# Altium PCB main.PcbDoc (part 1 of 2)
Units mil, origin at the board's own origin, x right, y up, seen from the top; angles counter-clockwise.
Board outline 2900 x 2350 mil, 2 copper layers (Top Layer, Bottom Layer); 128 components, 79 nets, 285 pads, 6 vias.
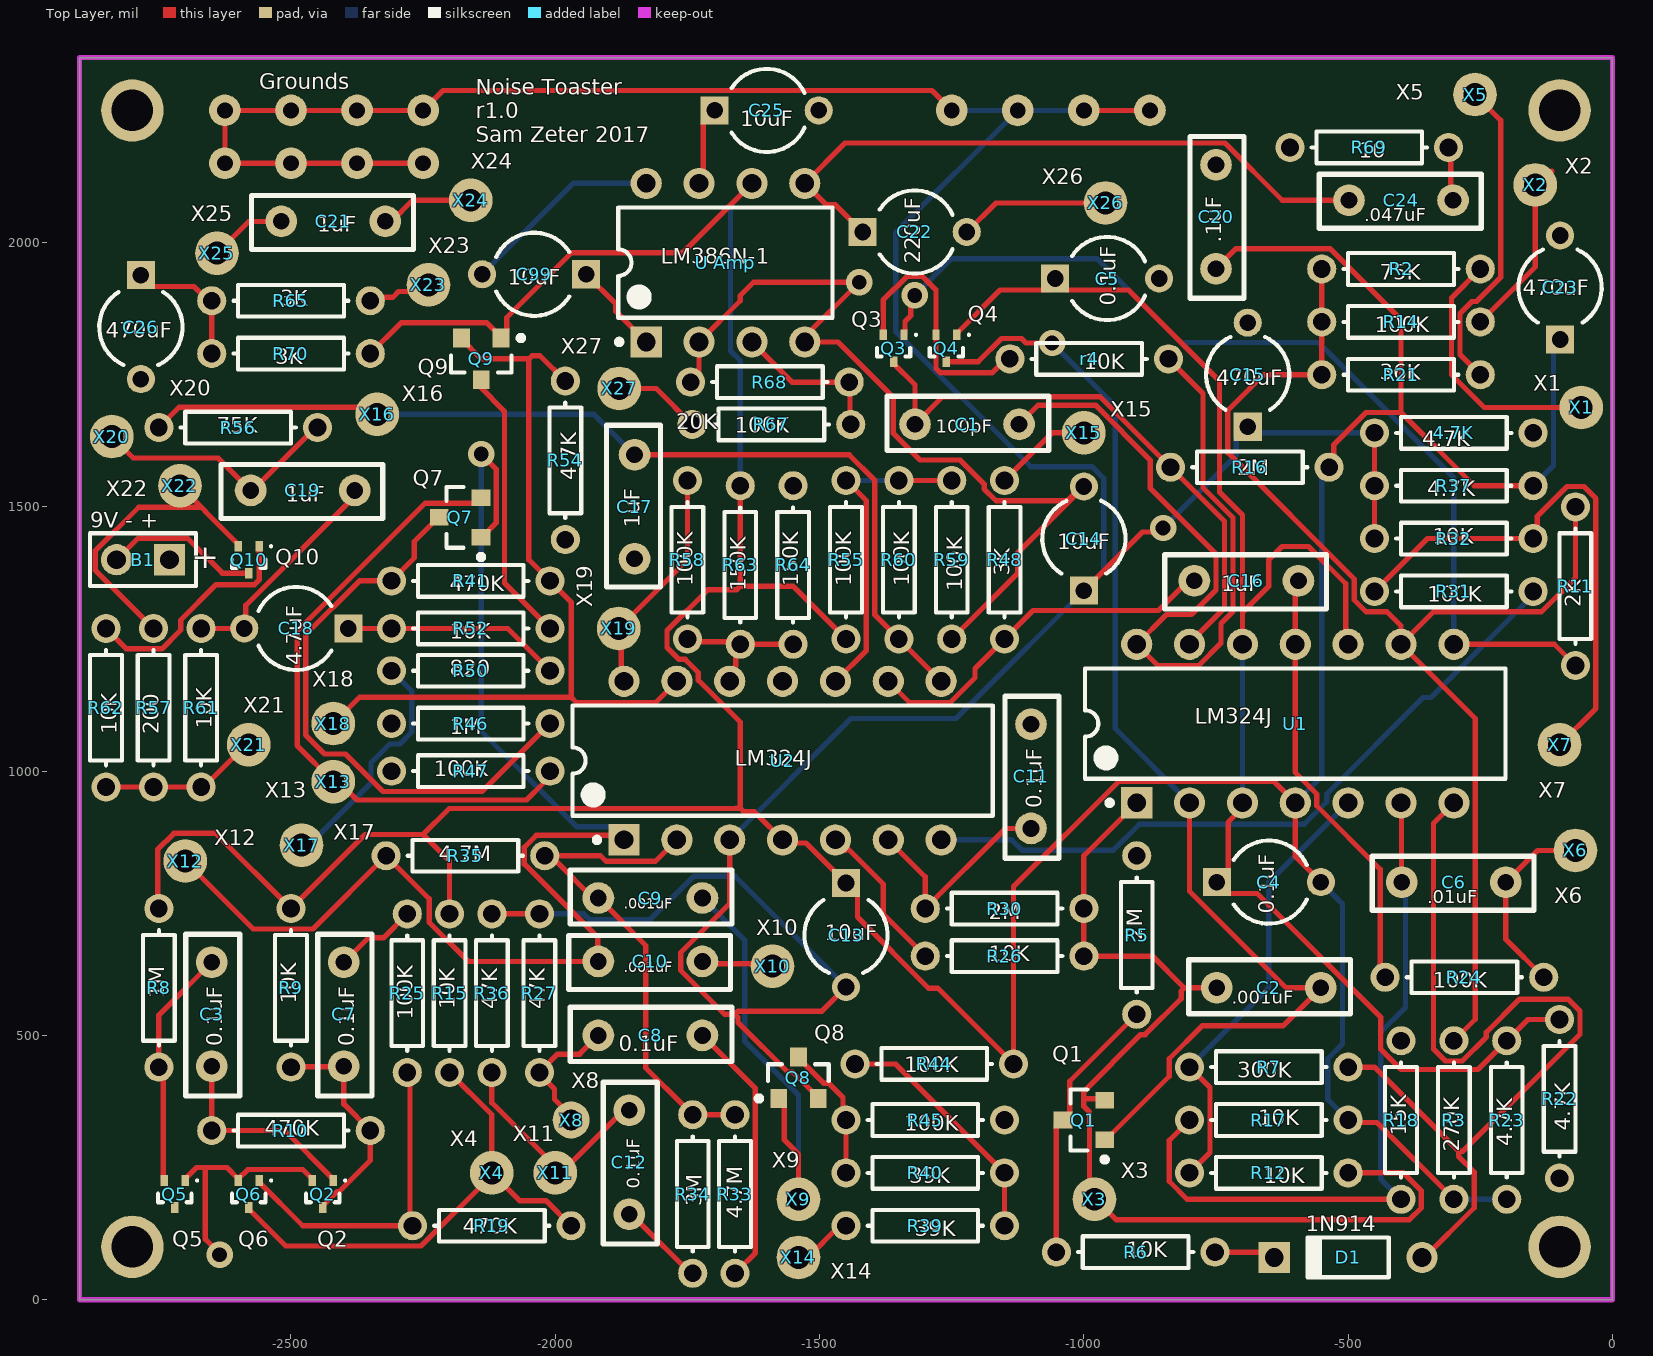
[diagram p0: Top Layer view]
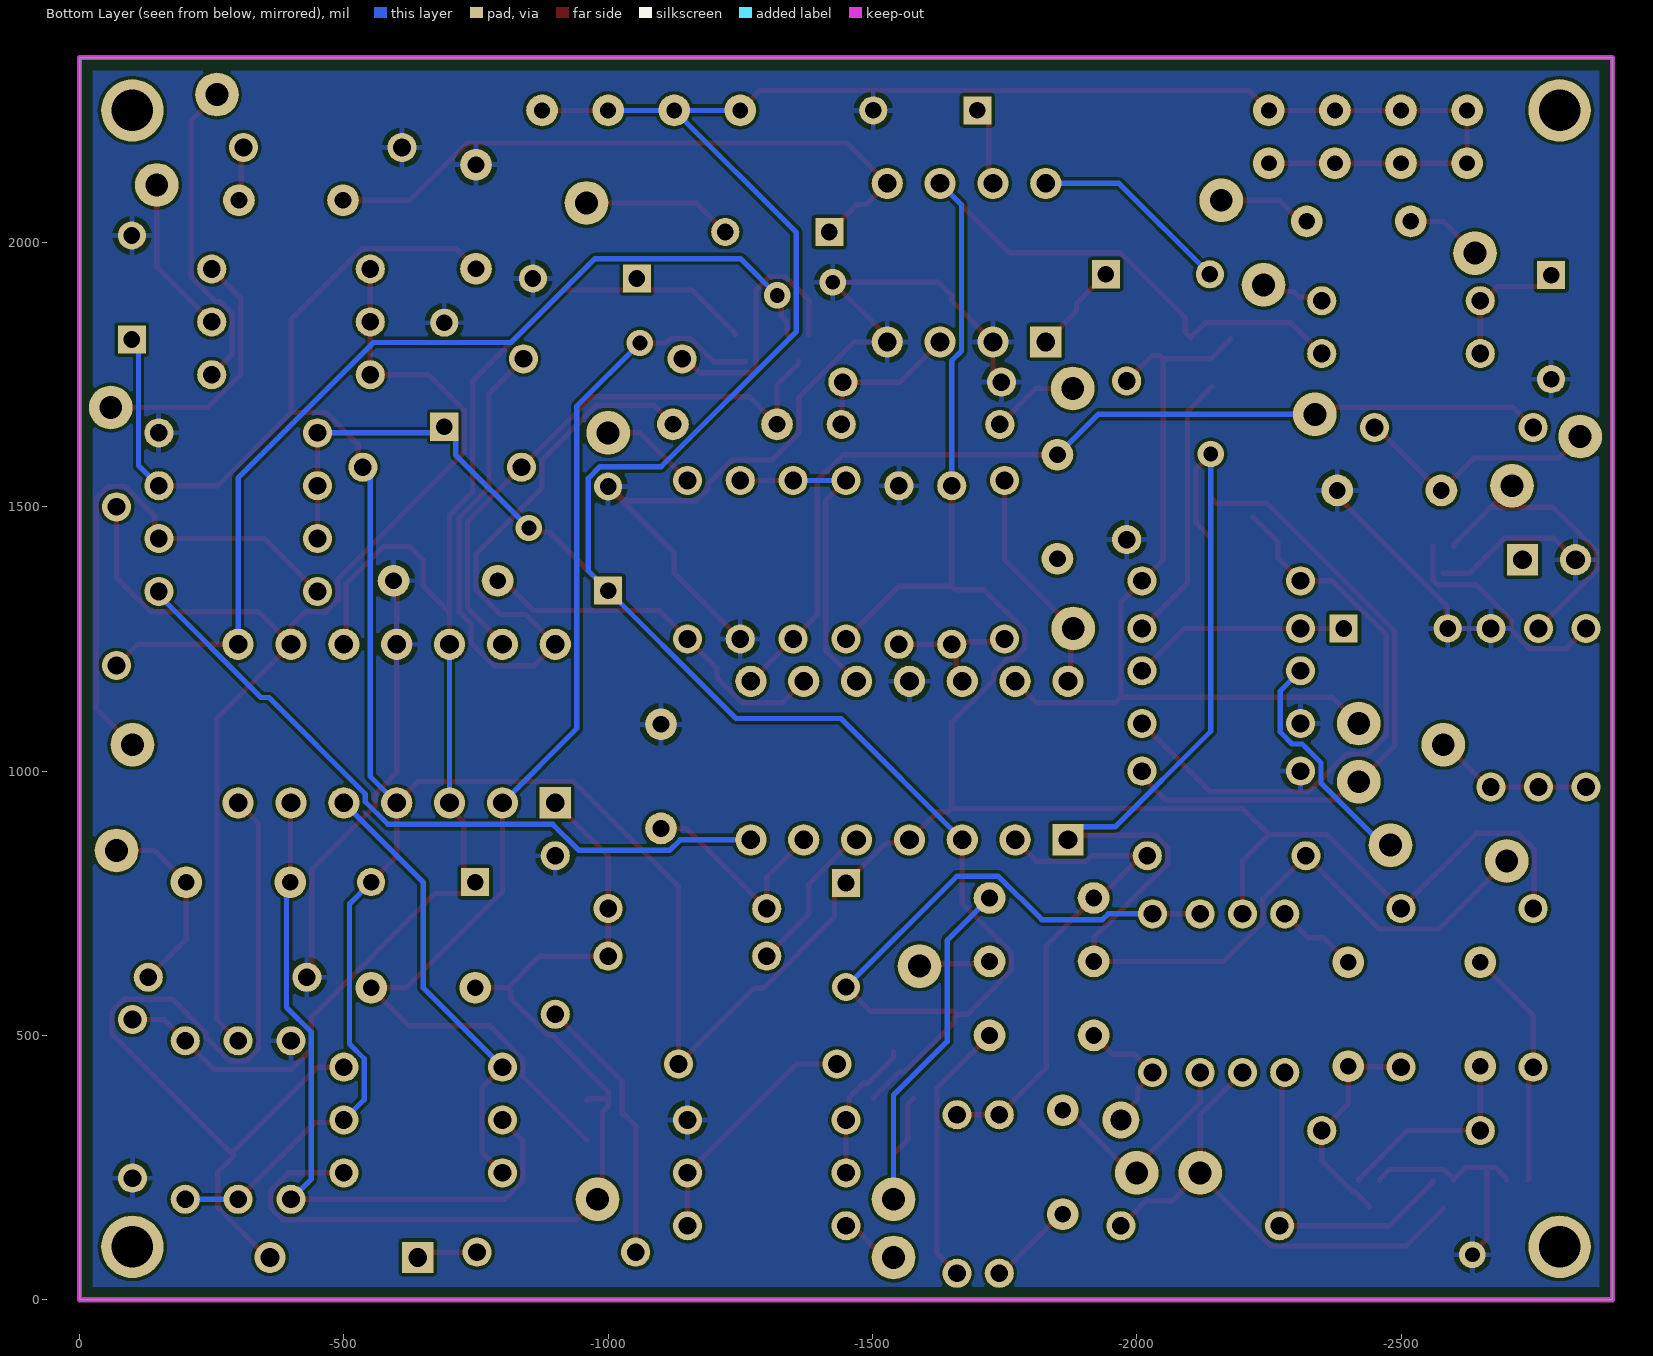
[diagram p1: Bottom Layer view, seen from below]

## Layer stack, top to bottom
Top Solder: solder mask 0.4, Solder Resist, Dk 3.5
Top Layer: signal copper 1.4
Dielectric 1: dielectric 12.6, FR-4, Dk 4.8
Bottom Layer: signal copper 1.4
Bottom Solder: solder mask 0.4, Solder Resist, Dk 3.5

## Board outline
-2900,0 -2900,2350 0,2350 0,0

## Design rules (kind name [scope] priority, off if disabled: settings)
Clearance [All] p1: gap=6 ignorepadtopadclearanceinfootprint=TRUE
MinimumSolderMaskSliver [All] p1: minsoldermaskwidth=3
PolygonConnect [All] p1: connectstyle=Relief reliefconductorwidth=10 reliefentries=4 polygonreliefangle="90 Angle" airgapwidth=10
RoutingVias [All] p1: holewidth=28 width=50 viastyle="Through Hole" minholewidth=28 minwidth=50 maxholewidth=28 maxwidth=50
SilkToSilkClearance [All] p1 off: silktosilkclearance=10
SilkToSolderMaskClearance [IsPad] p1: minsilkscreentomaskgap=6 clearancetoexposedcopper=TRUE
SolderMaskExpansion [All] p1: expansion=4
UnRoutedNet [All] p1: checkbadconnections=TRUE
Width [All] p1: maxlimit=25 minlimit=6 preferedwidth=10 minimp=50.000000 maximp=50.000000 favimp=50.000000
26 further rules are at their usual default settings.

## Classes and differential pairs
component class "AD Generator": C18 Q9 Q10 R50 R52 R54 R57 R58 R61 R62 R63 R64 X17 X18 X19 X21 X22
component class "Audio Amplifier": C20 C21 C22 C24 C25 C99 R67 R68 R69 "U Amp" X24 X25 X26 X27
component class LFO: C16 C17 C19 C26 R48 R55 R56 R59 R60 R65 R70 X15 X16 X20 X23
component class Top: 4.7K B1 C13 C14 C15 C23 R37
component class VCA: Q7 R41 R46 R47 X12 X13
component class "VC LPF": C8 C9 C10 C12 Q8 R27 R33 R34 R35 R36 R39 R40 R44 R45 U2 X8 X9 X10 X11 X14
component class VCO: C1 C2 C4 C5 C6 C11 D1 Q1 Q3 Q4 R2 R3 r4 R5 R6 R7 R11 R12 R14 R16 R17 R18 R21 R22 R23 R24 R26 R30 R31 R32 U1 X1 X2 X3 X5 X6 X7
component class WNS: C3 C7 Q2 Q5 Q6 R8 R9 R10 R15 R19 R25 X4

## Components (designator, comment, footprint, x,y, rotation, side; value= is the part's Value field where it differs from the comment)
4.7K "4.7K" AXIAL-0.3 -300,1640 r0 top
B1 "9V - +" BAT-2 -2780,1400 r180 top
C1 "100pF" "Cap Film 5" -1221,1656 r0 top
C2 ".001uF" "Cap Film 5" -650,590 r0 top value=0.001uF
C3 "0.1uF" "Cap Film 5" -2650,540 r270 top
C4 "0.1uF" CAPR5-4X5 -650,790 r0 top
C5 "0.1uF" CAPR5-4X5 -956,1932 r0 top
C6 ".01uF" "Cap Film 5" -300,790 r180 top value=0.01uF
C7 "0.1uF" "Cap Film 5" -2400,540 r270 top
C8 "0.1uF" "Cap Film 5" -1820,500 r0 top
C9 ".001uF" "Cap Film 5" -1820,760 r0 top value=0.001uF
C10 ".001uF" "Cap Film 5" -1820,640 r180 top value=0.001uF
C11 "0.1uF" "Cap Film 5" -1100,990 r270 top
C12 "0.1uF" "Cap Film 5" -1860,260 r270 top
C13 "10uF" CAPR5-4X5 -1450,690 r270 top
C14 "10uF" CAPR5-4X5 -1000,1440 r90 top
C15 "470uF" CAPR5-4X5 -690,1750 r90 top
C16 "1uF" "Cap Film 5" -692.43,1360 r180 top
C17 "1uF" "Cap Film 5" -1850,1500 r90 top
C18 "4.7uF" CAPR5-4X5 -2490,1270 r180 top
C19 "1uF" "Cap Film 5" -2478,1531 r180 top
C20 ".1uF" "Cap Film 5" -750,2049 r270 top value=0.1uF
C21 "1uF" "Cap Film 5" -2420,2040 r180 top
C22 "220uF" CAPR5-4X5 -1320,2020 r0 top
C23 "470uF" CAPR5-4X5 -99,1915 r90 top
C24 ".047uF" "Cap Film 5" -400,2080 r180 top value=0.047uF
C25 "10uF" CAPR5-4X5 -1600,2250 r0 top
C26 "470uF" CAPR5-4X5 -2784,1840 r270 top
C99 "10uF" CAPR5-4X5 -2040,1940 r180 top
D1 "1N914" DO-35 -500,80 r180 top
Q1 "Q1" ONSC-SOT-23-3-318-08_V -1000,340 r180 top
Q2 "Q2" ONSC-SC-75-3-463-01_V -2440,200 r270 top
Q3 "Q3" ONSC-SC-75-3-463-01_V -1360,1800 r270 top
Q4 "Q4" ONSC-SC-75-3-463-01_V -1260,1800 r270 top
Q5 "Q5" ONSC-SC-75-3-463-01_V -2720,200 r270 top
Q6 "Q6" ONSC-SC-75-3-463-01_V -2580,200 r270 top
Q7 "Q7" ONSC-SOT-23-3-318-08_V -2180,1480 r180 top
Q8 "Q8" ONSC-SOT-23-3-318-08_V -1540,420 r90 top
Q9 "Q9" ONSC-SOT-23-3-318-08_V -2140,1780 r270 top
Q10 "Q10" ONSC-SC-75-3-463-01_V -2580,1400 r270 top
R2 "75K" AXIAL-0.3 -400,1950 r180 top
R3 "270K" AXIAL-0.3 -300,340 r270 top
r4 "10K" AXIAL-0.3 -990,1780 r180 top (schematic designator R4)
R5 "2M" AXIAL-0.3 -900,690 r270 top
R6 "10K" AXIAL-0.3 -902.01,90 r0 top
R7 "300K" AXIAL-0.3 -650,440 r0 top
R8 "1M" AXIAL-0.3 -2750,590 r90 top
R9 "10K" AXIAL-0.3 -2500,590 r90 top
R10 "470K" AXIAL-0.3 -2500,320 r0 top
R11 "2K" AXIAL-0.3 -70,1350 r270 top
R12 "10K" AXIAL-0.3 -650,240 r180 top
R14 "100K" AXIAL-0.3 -400,1850 r180 top
R15 "10K" AXIAL-0.3 -2200,580 r90 top
R16 "2M" AXIAL-0.3 -686,1575 r180 top
R17 "10K" AXIAL-0.3 -650,340 r180 top
R18 "15K" AXIAL-0.3 -400,340 r90 top
R19 "470K" AXIAL-0.3 -2120,140 r0 top
R21 "36K" AXIAL-0.3 -400,1750 r180 top
R22 "4.7K" AXIAL-0.3 -100,380 r90 top
R23 "4.7K" AXIAL-0.3 -200,340 r90 top
R24 "100K" AXIAL-0.3 -280,610 r180 top
R25 "100K" AXIAL-0.3 -2280,580 r90 top
R26 "10K" AXIAL-0.3 -1150,650 r180 top
R27 "47K" AXIAL-0.3 -2030,580 r90 top
R30 "2M" AXIAL-0.3 -1150,740 r180 top
R31 "100K" AXIAL-0.3 -300,1340 r180 top
R32 "10K" AXIAL-0.3 -300,1440 r180 top
R33 "4.7M" AXIAL-0.3 -1660,200 r90 top
R34 "3M" AXIAL-0.3 -1740,200 r90 top
R35 "4.7M" AXIAL-0.3 -2170,840 r180 top
R36 "47K" AXIAL-0.3 -2120,580 r90 top
R37 "4.7K" AXIAL-0.3 -300,1540 r0 top
R39 "39K" AXIAL-0.3 -1300,140 r0 top
R40 "39K" AXIAL-0.3 -1300,240 r180 top
R41 "470K" AXIAL-0.3 -2160,1360 r0 top
R44 "100K" AXIAL-0.3 -1283,446 r180 top
R45 "100K" AXIAL-0.3 -1300,340 r180 top
R46 "1M" AXIAL-0.3 -2160,1090 r0 top
R47 "100K" AXIAL-0.3 -2160,1000 r0 top
R48 "3K" AXIAL-0.3 -1150,1400 r90 top
R50 "820" AXIAL-0.3 -2160,1190 r0 top
R52 "10K" AXIAL-0.3 -2160,1270 r0 top
R54 "4.7K" AXIAL-0.3 -1981,1588 r90 top
R55 "100K" AXIAL-0.3 -1450,1400 r90 top
R56 "75K" AXIAL-0.3 -2600,1650 r0 top
R57 "200" AXIAL-0.3 -2760,1120 r90 top
R58 "100K" AXIAL-0.3 -1750,1400 r90 top
R59 "100K" AXIAL-0.3 -1250,1400 r90 top
R60 "100K" AXIAL-0.3 -1350,1400 r270 top
R61 "10K" AXIAL-0.3 -2670,1120 r270 top
R62 "10K" AXIAL-0.3 -2850,1120 r90 top
R63 "150K" AXIAL-0.3 -1650,1390 r90 top
R64 "150K" AXIAL-0.3 -1550,1390 r90 top
R65 "3K" AXIAL-0.3 -2500,1890 r0 top
R67 "100K" AXIAL-0.3 -1591,1656 r0 top
R68 "20K" AXIAL-0.3 -1594,1736 r0 top
R69 "10" AXIAL-0.3 -460,2180 r0 top
R70 "3K" AXIAL-0.3 -2500,1790 r180 top
U1 "LM324J" J14A -600,1090 r90 top
U2 "LM324J" J14A -1570,1020 r90 top
"U Amp" "LM386N-1" N08E -1678,1962 r90 top
X1 "X1" Pad#1 -59,1688 r0 top
X2 "X2" Pad#1 -146,2109 r0 top
X3 "X3" Pad#1 -980,190 r0 top
X4 "X4" Pad#1 -2120,240 r0 top
X5 "X5" Pad#1 -260,2280 r0 top
X6 "X6" Pad#1 -70,850 r0 top
X7 "X7" Pad#1 -100,1050 r0 top
X8 "X8" Pad#2 -1970,340 r0 top
X9 "X9" Pad#1 -1540,190 r0 top
X10 "X10" Pad#1 -1589,631 r0 top
X11 "X11" Pad#1 -2000,240 r0 top
X12 "X12" Pad#1 -2700,830 r0 top
X13 "X13" Pad#1 -2420,980 r0 top
X14 "X14" Pad#1 -1540,80 r0 top
X15 "X15" Pad#1 -1000,1640 r0 top
X16 "X16" Pad#1 -2337,1675 r0 top
X17 "X17" Pad#1 -2480,860 r0 top
X18 "X18" Pad#1 -2420,1090 r0 top
X19 "X19" Pad#1 -1880,1270 r0 top
X20 "X20" Pad#1 -2839,1633 r0 top
X21 "X21" Pad#1 -2580,1050 r0 top
X22 "X22" Pad#1 -2710,1540 r0 top
X23 "X23" Pad#1 -2240,1920 r0 top
X24 "X24" Pad#1 -2160,2080 r0 top
X25 "X25" Pad#1 -2640,1980 r0 top
X26 "X26" Pad#1 -959,2075 r0 top
X27 "X27" Pad#1 -1879,1724 r0 top

## Footprints (in the part's own frame and the unit in brackets; to place one, negate y for a bottom-side part, rotate by r counter-clockwise, add the part's x,y. Pads: shape width x height; smd on the part's side, far side on the other; paste and mask are expansions set on the pad)
AXIAL-0.3 [mm] "Axial Device, Thru-Hole; 2 Leads; 0.3 in Pin Spacing"
  round 1.4 hole 0.85: 1(-3.81,0) 2(3.81,0)
  silkscreen extent -2.77,-0.76 2.77,0.76
BAT-2 [mm] "Battery; 2 Leads"
  rect 1.5x1.5 hole 0.9: 1(-1.27,0)
  round 1.5 hole 0.9: 2(1.27,0)
  silkscreen extent -2.54,-1.27 2.54,1.27
"Cap Film 5" [mil] "5mm length capacitor"
  round 60 hole 31.5: 1(-98.43,0) 2(98.43,0)
  silkscreen extent -152,-49 155,53
CAPR5-4X5 [mm] "Capacitor; 2 Leads"
  rect 1.35x1.35 hole 0.8: 1(-2.5,0)
  round 1.35 hole 0.8: 2(2.5,0)
  silkscreen extent -1.69,-2 1.82,2
DO-35 [mm] "Diode, Axial; Body 3.8 x 1.9 mm (LxDia. max), Lead Dia. 0.53 mm (max)"
  round 1.5 hole 0.9: 1(-3.55,0)
  rect 1.5x1.5 hole 0.9: 2(3.55,0)
  silkscreen extent -1.95,-0.95 2.05,0.95
J14A [mm] "DIP, 14-Pin, Row Spacing 7.62 mm, Pitch 2.54 mm"
  rect 1.5x1.5 hole 0.9: 1(-3.81,7.62)
  round 1.5 hole 0.9: 2(-3.81,5.08) 3(-3.81,2.54) 4(-3.81,0) 5(-3.81,-2.54) 6(-3.81,-5.08) 7(-3.81,-7.62) 8(3.81,-7.62) 9(3.81,-5.08) 10(3.81,-2.54) 11(3.81,0) 12(3.81,2.54) 13(3.81,5.08) 14(3.81,7.62)
  silkscreen extent -3.93,-10.1 2.65,10.1, body extent -3.6,-10.1 3.6,10.1, height 5.08
N08E [mm] "DIP, 8-Pin, Row Spacing 7.62 mm, Pitch 2.54 mm"
  rect 1.5x1.5 hole 0.9: 1(-3.81,3.81)
  round 1.5 hole 0.9: 2(-3.81,1.27) 3(-3.81,-1.27) 4(-3.81,-3.81) 5(3.81,-3.81) 6(3.81,-1.27) 7(3.81,1.27) 8(3.81,3.81)
  silkscreen extent -3.93,-5.15 2.65,5.23, body extent -3.6,-5.15 3.6,5.15, height 5.34
ONSC-SC-75-3-463-01_V [mil] "SOT23, 3-Leads, Body 1.6x0.8mm, Pitch 0.5mm"
  rect 20x14.02 smd: 1(-25.49,19.68) 2(-25.49,-19.69) 3(25.49,0)
  silkscreen extent -27,-31 16,44, body extent -16,-31 16,31, height 35
ONSC-SOT-23-3-318-08_V [mm] "SOT23, 3-Leads, Body 2.92x1.3mm, Pitch 0.95mm"
  rect 0.9x0.8 smd: 1(-1,0.95) 2(-1,-0.95) 3(1,0)
  silkscreen extent -1.13,-1.46 0.65,2.02, body extent -0.65,-1.46 0.65,1.46, height 1.11
Pad#1 [mm] "Simple Pad"
  round 2.1 hole 1.1: 1(0,0)
Pad#2 [mm] "Simple Pad"
  round 1.778 hole 1.016: 1(0,0)

## Part data
4.7K R22 R23 R37 R54: library part Res1, "Resistor", Manufacturer="Vishay / Dale", Manufacturer Part Number=CCF074K70JKE36, Operating Temperature Range="- 65 C to + 150 C", Power Rating="250 mW (1/4 W), 500 mW (1/2 W)", Resistance="4.7 kOhms", Supplier Part Number 1=71-CCF07-J-4.7K-E3, Temperature Coefficient="100 PPM / K", Tolerance="5 %", Voltage Rating="250 V", Brand="Vishay / Dale", Category="Metal Film Resistors - Through Hole", ComponentLink1Description=http://www.mouser.com/ds/2/427/ccf07-239748.pdf, ComponentLink1URL=http://www.mouser.com/ds/2/427/ccf07-239748.pdf, Diameter="2.29 mm", LatestRevisionDate=17-Jul-2002, LatestRevisionNote="Re-released for DXP Platform.", Lead Diameter="0.6 mm", Length="6.22 mm", Minimum Order Quantity=1, PackageDescription="Axial Device, Thru-Hole; 2 Leads; 0.3 in Pin Spacing", PackageReference=AXIAL-0.3, Packaging=Reel, Pricing 1="1=0.100, 100=0.040, 1000=0.030, 2000=0.027, 5000=0.025, 10000=0.022, 25000=0.020, 50000=0.018, 100000=0.016 (USD)", Product="Metal Film Resistors - Through Hole", Published=8-Jun-2000, Publisher="Altium Limited", Reeling=True, RoHS="RoHS Compliant", RoHS - Mouser=Y, Series=CCF07, Standard Pack Qty=5000, Stock 1=32326, Supplier 1=Mouser, Termination Style=Axial, Type="Metal Film Resistors, Industrial"
B1: library part Battery, "Multicell Battery", Manufacturer="Keystone Electronics", Manufacturer Part Number=233, Supplier Part Number 1=534-233, Battery Cell Size="9 V", Brand="Keystone Electronics", Category="9V Battery Snaps & Contacts", ComponentLink1Description=http://www.mouser.com/ds/2/215/32-234-741101.pdf, ComponentLink1URL=http://www.mouser.com/ds/2/215/32-234-741101.pdf, Contact Plating="Nickel Plating", LatestRevisionDate=17-Jul-2002, LatestRevisionNote="Re-released for DXP Platform.", Material=Brass, Minimum Order Quantity=1, Number of Batteries="1 Battery", PackageDescription="Battery; 2 Leads", PackageReference=BAT-2, Packaging=Bulk, Pricing 1="1=0.490, 10=0.467, 50=0.374, 100=0.358, 200=0.327, 500=0.312, 1000=0.259, 2500=0.234, 5000=0.226 (USD)", Product="Battery Snaps", Published=24-Mar-1999, Publisher="Altium Limited", Reeling=False, RoHS="RoHS Compliant", RoHS - Mouser=Y, Standard Pack Qty=100, Stock 1=3397, Supplier 1=Mouser, Type="Battery Strap"
C1: library part "Cap Film 5", Capacitance="100 pF", Capacitance - nF="0.1 nF", Case Style=Dipped, Dielectric="C0G (NP0)", Manufacturer="Vishay / BC Components", Manufacturer Part Number=K101J15C0GF53L2, Maximum Operating Temperature="+ 125 C", Minimum Operating Temperature="- 55 C", Operating Temperature Range="- 55 C to + 125 C", Supplier Part Number 1=594-K101J15C0GF53L2, Tolerance="5 %", Voltage Rating="50 V", Voltage Rating DC="50 VDC", Brand="Vishay / BC Components", Category="Multilayer Ceramic Capacitors MLCC - Leaded", ComponentLink1Description=http://www.mouser.com/ds/2/427/kvseries-1097555.pdf, ComponentLink1URL=http://www.mouser.com/ds/2/427/kvseries-1097555.pdf, Height="4 mm", Lead Spacing="2.5 mm", Minimum Order Quantity=1, Packaging=Bulk, Pricing 1="1=0.100, 50=0.060, 100=0.050, 1000=0.040, 5000=0.033, 10000=0.032, 15000=0.031, 25000=0.022 (USD)", Product="General Type MLCCs", Reeling=False, RoHS="RoHS Compliant By Exemption", RoHS - Mouser=E, Series=K, Standard Pack Qty=5000, Stock 1=11344, Supplier 1=Mouser, Temperature Coefficient / Code="C0G (NP0)", Termination Style=Radial, Tradename=Mono-Kap, Type="Radial Leads", Width="4 mm"
C2: library part "Cap Film 5", Supplier Part Number 1=667-ECQ-E6102JF3, Supplier 1=Mouser
C3 C7 C8 C12 C20: library part "Cap Film 5", Supplier Part Number 1=594-K104K20X7RH53K2, Supplier 1=Mouser
C4 C5: library part Cap2, "Capacitor", Supplier Part Number 1=594-K104K20X7RH53K2, PackageDescription="Capacitor; 2 Leads", PackageReference=CAPR5-4X5, Published=23-Sep-2002, Publisher="Altium Limited", Supplier 1=Mouser
C6: library part "Cap Film 5", Capacitance="0.01 uF", Capacitance - nF="10 nF", Capacitance - pF="10000 pF", Case Style=Dipped, Dielectric="C0G (NP0)", Manufacturer=TDK, Manufacturer Part Number=FG18C0G2A103JRT06, Maximum Operating Temperature="+ 125 C", Minimum Operating Temperature="- 55 C", Operating Temperature Range="- 55 C to + 125 C", Supplier Part Number 1=810-FG18C0G2A103JRT6, Tolerance="5 %", Voltage Rating="100 V", Voltage Rating DC="100 VDC", Brand=TDK, Category="Multilayer Ceramic Capacitors MLCC - Leaded", Class="Class 1", ComponentLink1Description=http://www.mouser.com/ds/2/400/eadmlcc_halogenfree_fg_en-775693.pdf, ComponentLink1URL=http://www.mouser.com/ds/2/400/eadmlcc_halogenfree_fg_en-775693.pdf, Height="2.5 mm", Lead Spacing="2.5 mm", Lead Style="Inside Bend", Length="4 mm", Minimum Order Quantity=1, Packaging=Reel, Pricing 1="1=0.440, 10=0.385, 100=0.154, 500=0.140, 1000=0.126, 2000=0.093, 10000=0.085, 24000=0.081, 50000=0.072 (USD)", Product="General Type MLCCs", Product Status="New Product", Reeling=True, RoHS="RoHS Compliant", RoHS - Mouser=Y, Series=FG, Standard Pack Qty=2000, Stock 1=5341, Supplier 1=Mouser, Termination Style=Radial, Type="Dipped Radial Multilayer Ceramic Capacitors", Width="5.5 mm"
C9: library part "Cap Film 5", Capacitance="0.01 uF", Capacitance - nF="10 nF", Capacitance - pF="10000 pF", Dielectric=Polyester, Manufacturer=Panasonic, Manufacturer Part Number=ECQ-E4103KF, Maximum Operating Temperature="+ 105 C", Minimum Operating Temperature="- 40 C", Supplier Part Number 1=667-ECQ-E6102JF3, Tolerance="5 %", Voltage Rating DC="400 VDC", Brand=Panasonic, Category="Film Capacitors", ComponentLink1Description=http://www.mouser.com/ds/2/315/ABD0000C179-947645.pdf, ComponentLink1URL=http://www.mouser.com/ds/2/315/ABD0000C179-947645.pdf, Height="7.4 mm", Lead Diameter="0.6 mm", Lead Spacing="7.5 mm", Length="10.3 mm", Minimum Order Quantity=1, Packaging=Bulk, Pricing 1="1=0.360, 10=0.173, 100=0.123, 500=0.111, 1000=0.093, 2000=0.088, 10000=0.077, 25000=0.074, 50000=0.066 (USD)", Product="General Film Capacitors", Reeling=False, RoHS="RoHS Compliant", RoHS - Mouser=Y, Series=ECQE(B), Standard Pack Qty=1000, Stock 1=175429, Supplier 1=Mouser, Termination Style=Radial, Type="Metallized Polyester Film Capacitor", Width="4.3 mm"
C10: library part "Cap Film 5", Capacitance="1000 pF", Capacitance - nF="1 nF", Capacitance - uF="0.001 uF", Dielectric=Polyester, Manufacturer=Panasonic, Manufacturer Part Number=ECQ-E6102JF3, Maximum Operating Temperature="+ 105 C", Minimum Operating Temperature="- 40 C", Supplier Part Number 1=667-ECQ-E6102JF3, Tolerance="5 %", Voltage Rating DC="630 VDC", Brand=Panasonic, Category="Film Capacitors", ComponentLink1Description=http://www.mouser.com/ds/2/315/ABD0000C179-947645.pdf, ComponentLink1URL=http://www.mouser.com/ds/2/315/ABD0000C179-947645.pdf, Lead Diameter="0.6 mm", Lead Spacing="5 mm", Length="10 mm", Minimum Order Quantity=1, Number of Pins=2, Pricing 1="1=0.500, 10=0.244, 100=0.174, 500=0.157, 1000=0.132, 2000=0.118, 10000=0.108, 25000=0.105, 50000=0.093 (USD)", Product="General Film Capacitors", Reeling=False, RoHS="RoHS Compliant", RoHS - Mouser=Y, Series=ECQE(B), Standard Pack Qty=1000, Stock 1=1487, Supplier 1=Mouser, Termination Style=Radial, Type="Metallized Polyester Film Capacitor", Width="4.5 mm"
C11: library part "Cap Film 5", Capacitance="0.1 uF", Capacitance - nF="100 nF", Capacitance - pF="100000 pF", Case Style=Dipped, Dielectric=X7R, Manufacturer="Vishay / BC Components", Manufacturer Part Number=K104K20X7RH53K2, Maximum Operating Temperature="+ 125 C", Minimum Operating Temperature="- 55 C", Operating Temperature Range="- 55 C to + 125 C", Supplier Part Number 1=594-K104K20X7RH53K2, Tolerance="10 %", Voltage Rating="100 V", Voltage Rating DC="100 VDC", Brand="Vishay / BC Components", Category="Multilayer Ceramic Capacitors MLCC - Leaded", ComponentLink1Description=http://www.mouser.com/ds/2/427/kvseries-1097555.pdf, ComponentLink1URL=http://www.mouser.com/ds/2/427/kvseries-1097555.pdf, Height="5 mm", Lead Diameter="0.5 mm", Lead Spacing="2.5 mm", Lead Style="Outside Kink", Length="5 mm", Minimum Order Quantity=1, Packaging=Bulk, Pricing 1="1=0.380, 100=0.190, 300=0.160, 500=0.130, 1000=0.100, 2000=0.090, 11000=0.080, 23000=0.075 (USD)", Product="General Type MLCCs", Reeling=False, RoHS="RoHS Compliant By Exemption", RoHS - Mouser=E, Series=K, Standard Pack Qty=5000, Stock 1=40614, Supplier 1=Mouser, Temperature Coefficient / Code=X7R, Termination Style=Radial, Tradename=Mono-Kap, Type="Radial Leads", Width="5 mm"
C13 C14 C25 C99: library part Cap2, "Capacitor", Capacitance="10 uF", Manufacturer=Panasonic, Manufacturer Part Number=ECA-1VM100, Maximum Operating Temperature="+ 85 C", Minimum Operating Temperature="- 40 C", Package / Case="Radial, Can", Ripple Current="60 mA", Supplier Part Number 1=667-ECA-1VM100, Tolerance="20 %", Voltage Rating DC="35 VDC", Brand=Panasonic, Category="Aluminum Electrolytic Capacitors - Leaded", ComponentLink1Description=http://www.mouser.com/ds/2/315/ABA0000C1047-947484.pdf, ComponentLink1URL=http://www.mouser.com/ds/2/315/ABA0000C1047-947484.pdf, Diameter="5 mm", Lead Spacing="2 mm", Lead Style=Straight, Length="11 mm", Life="2000 Hour", Minimum Order Quantity=1, PackageDescription="Capacitor; 2 Leads", PackageReference=CAPR5-4X5, Packaging=Bulk, Pricing 1="1=0.200, 10=0.080, 100=0.055, 500=0.046, 1000=0.041, 2500=0.039, 10000=0.030, 25000=0.028, 50000=0.025 (USD)", Product="General Purpose Electrolytic Capacitors", Published=23-Sep-2002, Publisher="Altium Limited", Reeling=False, RoHS="RoHS Compliant", RoHS - Mouser=Y, Series=M, Standard Pack Qty=200, Stock 1=30530, Supplier 1=Mouser, Termination Style=Radial, Type="Radial Lead Type"
C15 C23: library part Cap2, "Capacitor", Capacitance="470 uF", Manufacturer=Panasonic, Manufacturer Part Number=ECA-1VM471, Maximum Operating Temperature="+ 85 C", Minimum Operating Temperature="- 40 C", Package / Case="Radial, Can", Ripple Current="550 mA", Supplier Part Number 1=667-ECA-1VM471, Tolerance="20 %", Voltage Rating DC="35 VDC", Brand=Panasonic, Category="Aluminum Electrolytic Capacitors - Leaded", ComponentLink1Description=http://www.mouser.com/ds/2/315/ABA0000C1047-947484.pdf, ComponentLink1URL=http://www.mouser.com/ds/2/315/ABA0000C1047-947484.pdf, Diameter="10 mm", Dissipation Factor DF=0.14, Lead Spacing="5 mm", Lead Style=Straight, Length="16 mm", Life="2000 Hour", Minimum Order Quantity=1, PackageDescription="Capacitor; 2 Leads", PackageReference=CAPR5-4X5, Packaging=Bulk, Pricing 1="1=0.470, 10=0.252, 100=0.187, 500=0.162, 1000=0.138, 2500=0.130, 10000=0.112, 25000=0.110, 50000=0.104 (USD)", Product="General Purpose Electrolytic Capacitors", Published=23-Sep-2002, Publisher="Altium Limited", Reeling=False, RoHS="RoHS Compliant", RoHS - Mouser=Y, Series=M, Standard Pack Qty=200, Stock 1=25570, Supplier 1=Mouser, Termination Style=Radial, Type="Radial Lead Type"
C16 C17 C19: library part "Cap Film 5", Capacitance="1 uF", Capacitance - nF="1000 nF", Dielectric=Polyester, Manufacturer=Panasonic, Manufacturer Part Number=ECQ-E2105KF, Maximum Operating Temperature="+ 105 C", Minimum Operating Temperature="- 40 C", Supplier Part Number 1=667-ECQ-E2105KF, Tolerance="10 %", Voltage Rating DC="250 VDC", Brand=Panasonic, Category="Film Capacitors", ComponentLink1Description=http://www.mouser.com/ds/2/315/ABD0000C179-947645.pdf, ComponentLink1URL=http://www.mouser.com/ds/2/315/ABD0000C179-947645.pdf, Height="15 mm", Lead Diameter="0.8 mm", Lead Spacing="15 mm", Length="18.5 mm", Minimum Order Quantity=1, Packaging=Bulk, Pricing 1="1=0.680, 10=0.361, 100=0.268, 500=0.233, 1000=0.198, 2000=0.186, 10000=0.160, 25000=0.157, 50000=0.150 (USD)", Product="General Film Capacitors", Reeling=False, RoHS="RoHS Compliant", RoHS - Mouser=Y, Series=ECQE(B), Standard Pack Qty=1000, Stock 1=10797, Supplier 1=Mouser, Termination Style=Radial, Type="Metallized Polyester Film Capacitor", Width="7.4 mm"
C18: library part Cap2, "Capacitor", Capacitance="4.7 uF", Capacitance - nF="4700 nF", Leakage Current="10 uA", Manufacturer=Panasonic, Manufacturer Part Number=ECA-2WHG4R7, Maximum Operating Temperature="+ 105 C", Minimum Operating Temperature="- 25 C", Package / Case="Radial, Can", Ripple Current="49 mA", Supplier Part Number 1=667-ECA-2WHG4R7, Tolerance="20 %", Voltage Rating DC="450 VDC", Brand=Panasonic, Category="Aluminum Electrolytic Capacitors - Leaded", ComponentLink1Description=http://www.mouser.com/ds/2/315/ABA0000C1215-1109177.pdf, ComponentLink1URL=http://www.mouser.com/ds/2/315/ABA0000C1215-1109177.pdf, Diameter="10 mm", Dissipation Factor DF=0.24, Lead Spacing="5 mm", Lead Style=Straight, Length="20 mm", Life="2000 Hour", Minimum Order Quantity=1, PackageDescription="Capacitor; 2 Leads", PackageReference=CAPR5-4X5, Packaging=Bulk, Pricing 1="1=0.630, 10=0.372, 100=0.292, 500=0.252, 1000=0.212, 2500=0.199, 10000=0.180, 25000=0.173, 50000=0.166 (USD)", Product="General Purpose Electrolytic Capacitors", Published=23-Sep-2002, Publisher="Altium Limited", Reeling=False, RoHS="RoHS Compliant", RoHS - Mouser=Y, Series=NHG, Standard Pack Qty=200, Stock 1=5633, Supplier 1=Mouser, Termination Style=Radial, Type="Radial Lead Type"
C21: library part "Cap Film 5", Manufacturer=Panasonic, Manufacturer Part Number=ECQ-E2105KF, Supplier Part Number 1=667-ECQ-E2105KF, Supplier 1=Mouser
C22: library part Cap2, "Capacitor", Capacitance="220 uF", Manufacturer=Panasonic, Manufacturer Part Number=EEU-FC1V221, Maximum Operating Temperature="+ 105 C", Minimum Operating Temperature="- 55 C", Ripple Current="755 mA", Supplier Part Number 1=667-EEU-FC1V221, Tolerance="20 %", Voltage Rating DC="35 VDC", Brand=Panasonic, Category="Aluminum Electrolytic Capacitors - Leaded", ComponentLink1Description=http://www.mouser.com/ds/2/315/ABA0000CE22-68457.pdf, ComponentLink1URL=http://www.mouser.com/ds/2/315/ABA0000CE22-68457.pdf, Diameter="10 mm", ESR="90 mOhms", Lead Spacing="5 mm", Length="12.5 mm", Life="3000 Hour", Minimum Order Quantity=1, PackageDescription="Capacitor; 2 Leads", PackageReference=CAPR5-4X5, Packaging=Bulk, Pricing 1="1=0.540, 10=0.290, 100=0.215, 500=0.187, 1000=0.159, 2500=0.150, 10000=0.129, 25000=0.127, 50000=0.120 (USD)", Product="High Temp Electrolytic Capacitors", Published=23-Sep-2002, Publisher="Altium Limited", Reeling=False, RoHS="RoHS Compliant", RoHS - Mouser=Y, Series=FC, Standard Pack Qty=200, Stock 1=11676, Supplier 1=Mouser, Termination Style=Radial, Type="Radial Lead Type"
C24: library part "Cap Film 5", Capacitance="0.047 uF", Capacitance - nF="47 nF", Capacitance - pF="47000 pF", Case Style=Dipped, Dielectric="C0G (NP0)", Manufacturer=TDK, Manufacturer Part Number=FG16C0G2A473JRT06, Maximum Operating Temperature="+ 125 C", Minimum Operating Temperature="- 55 C", Operating Temperature Range="- 55 C to + 125 C", Supplier Part Number 1=810-FG16C0G2A473JRT6, Tolerance="5 %", Voltage Rating="100 V", Voltage Rating DC="100 VDC", Brand=TDK, Category="Multilayer Ceramic Capacitors MLCC - Leaded", Class="Class 1", ComponentLink1Description=http://www.mouser.com/ds/2/400/eadmlcc_halogenfree_fg_en-775693.pdf, ComponentLink1URL=http://www.mouser.com/ds/2/400/eadmlcc_halogenfree_fg_en-775693.pdf, Height="3.5 mm", Lead Spacing="2.5 mm", Lead Style="Inside Bend", Length="5.5 mm", Minimum Order Quantity=1, Packaging=Reel, Pricing 1="1=0.980, 10=0.832, 100=0.408, 500=0.368, 1000=0.337, 2000=0.219, 10000=0.208, 24000=0.204, 50000=0.199 (USD)", Product="General Type MLCCs", Product Status="New Product", Reeling=True, RoHS="RoHS Compliant", RoHS - Mouser=Y, Series=FG, Standard Pack Qty=2000, Stock 1=3902, Supplier 1=Mouser, Termination Style=Radial, Type="Dipped Radial Multilayer Ceramic Capacitors", Width="6 mm"
C26: library part Cap2, "Capacitor", Supplier Part Number 1=667-ECA-1VM471, PackageDescription="Capacitor; 2 Leads", PackageReference=CAPR5-4X5, Published=23-Sep-2002, Publisher="Altium Limited", Supplier 1=Mouser
D1: library part "Diode 1N914", "High Conductance Fast Diode", Supplier Part Number 1=512-1N914, Code_JEDEC=DO-204-AH, ComponentLink1Description="Manufacturer Link", ComponentLink1URL=http://www.fairchildsemi.com/, ComponentLink2Description=Datasheet, ComponentLink2URL=http://www.fairchildsemi.com/ds/1N%2F1N4448.pdf, DatasheetVersion=1997, LatestRevisionDate=17-Jul-2002, LatestRevisionNote="Re-released for DXP Platform.", PackageDescription="Diode, Axial; Body 3.8 x 1.9 mm (LxDia. max), Lead Dia. 0.53 mm (max)", PackageReference=DO-35, Published=8-Jun-2000, Publisher="Altium Limited", Supplier 1=Mouser
Q1 Q9: library part MMBF4391LT1, "JFET Switching Transistor, N-Channel, 3-Pin SOT-23, Tape and Reel", Manufacturer="On Semiconductor", Supplier Part Number 1=863-MMBF4391LT1G, Vds - Drain-Source Breakdown Voltage="30 V", Channel Polarity="N Channel", Ciss Max (pF)=14, ComponentLink1Description="Manufacturer URL", ComponentLink1URL=http://www.onsemi.com/, ComponentLink2Description=Datasheet, ComponentLink2URL=http://www.onsemi.com/pub_link/Collateral/MMBF4391LT1-D.PDF, ComponentLink3Description="Package Specification", ComponentLink3URL=http://www.onsemi.cn/pub_link/Collateral/318-08.PDF, Crss Max (pF)=3.5, DatasheetVersion="Rev. 10", IDSS Max (uA)=150000, IDSS Min (uA)=50000, Mounting Technology="Surface Mount", PackageDescription="3-Pin Small Outline Transistor, Body 2.92 x 1.3 mm, Pitch 0.95 mm", PackageReference=SOT-23-3-318-08, PackageVersion="Rev. AP, 11/2009", Packing="Tape and Reel", PartNumber=MMBF4391LT1, Supplier 1=Mouser, Supplier 2=Mouser, Supplier Part Number 2=863-MMBF4391LT1G, Transistor Polarity=N-Channel, V(BR)GSS Min (V)=30
Q2 Q3 Q5 Q6: library part MMBT3904TT1G, "General Purpose Transistor, NPN Silicon, 3-Pin SC-75, Pb-Free, Tape and Reel", Manufacturer="On Semiconductor", Supplier Part Number 1=863-MMBT3904TT1G, ComponentLink1Description="Manufacturer URL", ComponentLink1URL=http://www.onsemi.com/, ComponentLink2Description=Datasheet, ComponentLink2URL=http://www.onsemi.cn/pub_link/Collateral/MMBT3904TT1-D.PDF, ComponentLink3Description="Package Specification", ComponentLink3URL=http://www.onsemi.com/pub_link/Collateral/463-01.PDF, DatasheetVersion="Rev. 5", fT Min (MHz)=300, IC Continuous (A)=0.2, Mounting Technology="Surface Mount", PackageDescription="3-Pin Small Outline Transistor, Body 1.6 x 0.8 mm, Pitch 0.5 mm", PackageReference=SC-75-3-463-01, PackageVersion="Rev. F, 07/2005", Packing="Tape and Reel", PartNumber=MMBT3904TT1G, Polarity=NPN, RoHS=TRUE, Supplier 1=Mouser, Supplier 2=Digi-Key, Supplier 3=Digi-Key, Supplier 4=Farnell, Supplier 5=Newark, Supplier 6=Newark, Supplier 7=Mouser, Supplier Part Number 2=MMBT3904TT1GOSCT-ND, Supplier Part Number 3=MMBT3904TT1GOSDKR-ND, Supplier Part Number 4=2317833, Supplier Part Number 5=88H4787, Supplier Part Number 6=85W3166, Supplier Part Number 7=863-MMBT3904TT1G
Q4: library part MMBT3904TT1G, "General Purpose Transistor, NPN Silicon, 3-Pin SC-75, Pb-Free, Tape and Reel", Collector- Base Voltage VCBO="60 V", Collector-Emitter Saturation Voltage="0.3 V", Collector- Emitter Voltage VCEO Max="40 V", Continuous Collector Current="0.2 A", Emitter- Base Voltage VEBO="6 V", Manufacturer="On Semiconductor", Maximum Operating Temperature="+ 150 C", Minimum Operating Temperature="- 55 C", Package / Case=SC-75-3, Pd - Power Dissipation="225 mW", Supplier Part Number 1=863-MMBT3904TT1G, Brand="ON Semiconductor", Category="Bipolar Transistors - BJT", ComponentLink1Description="Manufacturer URL", ComponentLink1URL=http://www.onsemi.com/, ComponentLink2Description=Datasheet, ComponentLink2URL=http://www.onsemi.cn/pub_link/Collateral/MMBT3904TT1-D.PDF, ComponentLink3Description="Package Specification", ComponentLink3URL=http://www.onsemi.com/pub_link/Collateral/463-01.PDF, ComponentLink4Description=http://www.mouser.com/ds/2/308/MMBT3904TT1-D-80125.pdf, ComponentLink4URL=http://www.mouser.com/ds/2/308/MMBT3904TT1-D-80125.pdf, Configuration=Single, DatasheetVersion="Rev. 5", DC Collector/Base Gain hfe Min=40, fT Min (MHz)=300, Gain Bandwidth Product fT="300 MHz", Height="0.75 mm", IC Continuous (A)=0.2, Length="1.6 mm", Manufacturer Part Number=MMBT3904TT1G, Maximum DC Collector Current="0.2 A", Minimum Order Quantity=1, Mounting Style=SMD/SMT, Mounting Technology="Surface Mount", PackageDescription="3-Pin Small Outline Transistor, Body 1.6 x 0.8 mm, Pitch 0.5 mm", PackageReference=SC-75-3-463-01, PackageVersion="Rev. F, 07/2005", Packaging=Reel, Packing="Tape and Reel", PartNumber=MMBT3904TT1G, Polarity=NPN, Pricing 7="1=0.150, 10=0.130, 100=0.046, 1000=0.031, 3000=0.024, 9000=0.021, 24000=0.019, 45000=0.017, 99000=0.014 (USD)", Reeling=True, RoHS=TRUE, RoHS - Mouser=Y, Series=MMBT3904T, Standard Pack Qty=3000, Stock 7=46909, Supplier 1=Mouser, Supplier 2=Digi-Key, Supplier 3=Digi-Key, Supplier 4=Farnell, Supplier 5=Newark, Supplier 6=Newark, Supplier 7=Mouser, Supplier Part Number 2=MMBT3904TT1GOSCT-ND, Supplier Part Number 3=MMBT3904TT1GOSDKR-ND, Supplier Part Number 4=2317833, Supplier Part Number 5=88H4787, Supplier Part Number 6=85W3166, Supplier Part Number 7=863-MMBT3904TT1G, Transistor Polarity=NPN, Width="0.8 mm"
Q7 Q8: library part MMBF4391LT1, "JFET Switching Transistor, N-Channel, 3-Pin SOT-23, Tape and Reel", Drain-Source Current at Vgs=0="50 mA to 150 mA", Manufacturer="On Semiconductor", Manufacturer Part Number=MMBF4391LT1G, Package / Case=SOT-23-3, Supplier Part Number 1=863-MMBF4391LT1G, Vds - Drain-Source Breakdown Voltage="30 V", Brand="ON Semiconductor", Category=JFET, Channel Polarity="N Channel", Ciss Max (pF)=14, ComponentLink1Description="Manufacturer URL", ComponentLink1URL=http://www.onsemi.com/, ComponentLink2Description=Datasheet, ComponentLink2URL=http://www.onsemi.com/pub_link/Collateral/MMBF4391LT1-D.PDF, ComponentLink3Description="Package Specification", ComponentLink3URL=http://www.onsemi.cn/pub_link/Collateral/318-08.PDF, ComponentLink4Description=http://www.mouser.com/ds/2/308/MMBF4391LT1-D-108578.pdf, ComponentLink4URL=http://www.mouser.com/ds/2/308/MMBF4391LT1-D-108578.pdf, Configuration=Single, Crss Max (pF)=3.5, DatasheetVersion="Rev. 10", IDSS Max (uA)=150000, IDSS Min (uA)=50000, Minimum Order Quantity=1, Mounting Style=SMD/SMT, Mounting Technology="Surface Mount", PackageDescription="3-Pin Small Outline Transistor, Body 2.92 x 1.3 mm, Pitch 0.95 mm", PackageReference=SOT-23-3-318-08, PackageVersion="Rev. AP, 11/2009", Packaging=Reel, Packing="Tape and Reel", PartNumber=MMBF4391LT1, Pricing 2="1=0.490, 10=0.339, 100=0.156, 1000=0.120, 3000=0.102, 9000=0.093, 24000=0.087, 45000=0.078, 99000=0.075 (USD)", Reeling=True, RoHS="RoHS Compliant", RoHS - Mouser=Y, Series=MMBF4391L, Standard Pack Qty=3000, Stock 2=3330, Supplier 1=Mouser, Supplier 2=Mouser, Supplier Part Number 2=863-MMBF4391LT1G, Transistor Polarity=N-Channel, V(BR)GSS Min (V)=30, Vgs - Gate-Source Breakdown Voltage="30 V"
Q10: library part MMBT3906TT1G, "General Purpose Transistor, PNP Silicon, 3-Pin SC-75, Pb-Free, Tape and Reel", Collector- Base Voltage VCBO="- 40 V", Collector-Emitter Saturation Voltage="- 0.4 V", Continuous Collector Current="- 0.2 A", Emitter- Base Voltage VEBO="5 V", Manufacturer="On Semiconductor", Maximum DC Collector Current="0.2 A", Maximum Operating Temperature="+ 150 C", Minimum Operating Temperature="- 55 C", Package / Case=SC-75-3, Pd - Power Dissipation="225 mW", Supplier Part Number 1=863-MMBT3906TT1G, Brand="ON Semiconductor", Category="Bipolar Transistors - BJT", Collector- Emitter Voltage VCEO Max="- 40 V", ComponentLink1Description="Manufacturer URL", ComponentLink1URL=http://www.onsemi.com/, ComponentLink2Description=Datasheet, ComponentLink2URL=http://www.onsemi.cn/pub_link/Collateral/MMBT3906TT1-D.PDF, ComponentLink3Description="Package Specification", ComponentLink3URL=http://www.onsemi.com/pub_link/Collateral/463-01.PDF, ComponentLink4Description=http://www.mouser.com/ds/2/308/MMBT3906TT1-D-110239.pdf, ComponentLink4URL=http://www.mouser.com/ds/2/308/MMBT3906TT1-D-110239.pdf, Configuration=Single, DatasheetVersion="Rev. 1", DC Collector/Base Gain hfe Min=60, fT Min (MHz)=250, Gain Bandwidth Product fT="250 MHz", Height="0.75 mm", IC Continuous (A)=-0.2, Length="1.6 mm", Manufacturer Part Number=MMBT3906TT1G, Minimum Order Quantity=1, Mounting Style=SMD/SMT, Mounting Technology="Surface Mount", PackageDescription="3-Pin Small Outline Transistor, Body 1.6 x 0.8 mm, Pitch 0.5 mm", PackageReference=SC-75-3-463-01, PackageVersion="Rev. F, 07/2005", Packaging=Reel, Packing="Tape and Reel", PartNumber=MMBT3906TT1G, Polarity=PNP, Pricing 8="1=0.150, 10=0.130, 100=0.046, 1000=0.031, 3000=0.024, 9000=0.021, 24000=0.019, 45000=0.017, 99000=0.014 (USD)", Reeling=True, RoHS=TRUE, RoHS - Mouser=Y, Series=MMBT3906T, Standard Pack Qty=3000, Stock 8=24746, Supplier 1=Mouser
R2: library part Res1, "Resistor", Manufacturer=Yageo, Manufacturer Part Number=FMP200FRF52-75K, Operating Temperature Range="- 55 C to + 155 C", Power Rating="2 W", Resistance="75 kOhms", Supplier Part Number 1=603-FMP200FRF52-75K, Temperature Coefficient="100 PPM / C", Tolerance="1 %", Voltage Rating="500 V", Brand=Yageo, Category="Metal Film Resistors - Through Hole", ComponentLink1Description="http://www.mouser.com/ds/2/447/Yageo LR_FMP_2013-594466.pdf", ComponentLink1URL="http://www.mouser.com/ds/2/447/Yageo LR_FMP_2013-594466.pdf", Diameter="3.9 mm", LatestRevisionDate=17-Jul-2002, LatestRevisionNote="Re-released for DXP Platform.", Length="9 mm", Minimum Order Quantity=1, PackageDescription="Axial Device, Thru-Hole; 2 Leads; 0.3 in Pin Spacing", PackageReference=AXIAL-0.3, Packaging=Reel, Pricing 1="1=0.310, 10=0.192, 100=0.063, 1000=0.043, 2500=0.033, 10000=0.031, 25000=0.029, 100000=0.028 (USD)", Product="Metal Film Resistors General Purpose", Published=8-Jun-2000, Publisher="Altium Limited", Reeling=True, RoHS="RoHS Compliant", RoHS - Mouser=Y, Series=FMP, Standard Pack Qty=2500, Stock 1=6938, Supplier 1=Mouser, Termination Style=Axial, Type="High Power Type Ultra Miniature Style"
R3: library part Res1, "Resistor", Manufacturer="Vishay / Dale", Manufacturer Part Number=CMF07270K00GKR6, Operating Temperature Range="- 55 C to + 175 C", Power Rating="500 mW (1/2 W)", Resistance="270 kOhms", Supplier Part Number 1=71-CMF07270K00GKR6, Temperature Coefficient="100 PPM / C", Tolerance="2 %", Voltage Rating="250 V", Brand="Vishay / Dale", Category="Metal Film Resistors - Through Hole", ComponentLink1Description=http://www.mouser.com/ds/2/427/cmfind-239942.pdf, ComponentLink1URL=http://www.mouser.com/ds/2/427/cmfind-239942.pdf, Diameter="2.29 mm", LatestRevisionDate=17-Jul-2002, LatestRevisionNote="Re-released for DXP Platform.", Lead Diameter="0.64 mm", Length="6.1 mm", Minimum Order Quantity=1, PackageDescription="Axial Device, Thru-Hole; 2 Leads; 0.3 in Pin Spacing", PackageReference=AXIAL-0.3, Packaging=Reel, Pricing 1="1=0.160, 50=0.151, 100=0.130, 500=0.110, 1000=0.090, 2000=0.085, 5000=0.078, 10000=0.072, 25000=0.066 (USD)", Product="Metal Film Resistors Controlled Temp Coefficient", Published=8-Jun-2000, Publisher="Altium Limited", Reeling=True, RoHS="RoHS Compliant By Exemption", RoHS - Mouser=E, Series="CMF Industrial", Standard Pack Qty=1000, Stock 1=2501, Supplier 1=Mouser, Termination Style=Axial, Type="Metal Film Resistors, Industrial, Precision"
r4 R61 R62: library part Res1, "Metal Film Resistors - Through Hole 1/4watt 10Kohms 5% Rated to 1/2watt", Manufacturer="Vishay / Dale", Manufacturer Part Number=CCF0710K0JKE36, Operating Temperature Range="- 65 C to + 150 C", Power Rating="250 mW (1/4 W), 500 mW (1/2 W)", Resistance="10 kOhms", Supplier Part Number 1=71-CCF0710K0JKE36, Temperature Coefficient="100 PPM / K", Tolerance="5 %", Voltage Rating="250 V", Brand="Vishay / Dale", Category="Metal Film Resistors - Through Hole", ComponentLink1Description=http://www.mouser.com/ds/2/427/ccf07-239748.pdf, ComponentLink1URL=http://www.mouser.com/ds/2/427/ccf07-239748.pdf, Diameter="2.29 mm", LatestRevisionDate=17-Jul-2002, LatestRevisionNote="Re-released for DXP Platform.", Lead Diameter="0.6 mm", Length="6.22 mm", Minimum Order Quantity=1, PackageDescription="Axial Device, Thru-Hole; 2 Leads; 0.3 in Pin Spacing", PackageReference=AXIAL-0.3, Packaging=Reel, Pricing 1="1=0.100, 100=0.037, 1000=0.033, 2000=0.030, 5000=0.026, 10000=0.020, 25000=0.015, 50000=0.013, 100000=0.012 (USD)", Product="Metal Film Resistors - Through Hole", Published=8-Jun-2000, Publisher="Altium Limited", Reeling=True, RoHS="RoHS Compliant", RoHS - Mouser=Y, Series=CCF07, Standard Pack Qty=5000, Stock 1=48658, Supplier 1=Mouser, Termination Style=Axial, Type="Metal Film Resistors, Industrial"
R5 R16: library part Res1, "Resistor", Manufacturer Part Number=CMF5512M000FKEK, Supplier Part Number 1=71-CMF5512M000FKEK, LatestRevisionDate=17-Jul-2002, LatestRevisionNote="Re-released for DXP Platform.", PackageDescription="Axial Device, Thru-Hole; 2 Leads; 0.3 in Pin Spacing", PackageReference=AXIAL-0.3, Published=8-Jun-2000, Publisher="Altium Limited", Supplier 1=Mouser
R6: library part Res1, "Resistor", Manufacturer="Vishay / Dale", Manufacturer Part Number=CCF0710K0JKE36, Operating Temperature Range="- 65 C to + 150 C", Power Rating="250 mW (1/4 W), 500 mW (1/2 W)", Resistance="10 kOhms", Supplier Part Number 1=71-CMF5510K000BEEA, Temperature Coefficient="100 PPM / K", Tolerance="5 %", Voltage Rating="250 V", Brand="Vishay / Dale", Category="Metal Film Resistors - Through Hole", ComponentLink1Description=http://www.mouser.com/ds/2/427/ccf07-239748.pdf, ComponentLink1URL=http://www.mouser.com/ds/2/427/ccf07-239748.pdf, ComponentLink2Description=http://www.mouser.com/ds/2/427/cmfind-239942.pdf, ComponentLink2URL=http://www.mouser.com/ds/2/427/cmfind-239942.pdf, Diameter="2.29 mm", LatestRevisionDate=17-Jul-2002, LatestRevisionNote="Re-released for DXP Platform.", Lead Diameter="0.6 mm", Length="6.22 mm", Minimum Order Quantity=1, PackageDescription="Axial Device, Thru-Hole; 2 Leads; 0.3 in Pin Spacing", PackageReference=AXIAL-0.3, Packaging=Reel, Pricing 1="1=0.100, 100=0.037, 1000=0.033, 2000=0.030, 5000=0.026, 10000=0.020, 25000=0.015, 50000=0.013, 100000=0.012 (USD)", Pricing 2="1=0.610, 5000=0.249, 10000=0.242, 20000=0.236, 50000=0.234 (USD)", Product="Metal Film Resistors - Through Hole", Published=8-Jun-2000, Publisher="Altium Limited", Reeling=True, RoHS="RoHS Compliant", RoHS - Mouser=Y, Series=CCF07, Standard Pack Qty=5000, Stock 1=48658, Stock 2=4124, Supplier 1=Mouser, Supplier Part Number 2=71-CMF5510K000BEEA, Termination Style=Axial, Type="Metal Film Resistors, Industrial"
R7: library part Res1, "Resistor", Manufacturer="Vishay / Dale", Manufacturer Part Number=CMF55300K00BEBF, Operating Temperature Range="- 55 C to + 175 C", Power Rating="500 mW (1/2 W)", Resistance="300 kOhms", Supplier Part Number 1=71-CMF55300K00BEBF, Temperature Coefficient="25 PPM / C", Tolerance="0.1 %", Voltage Rating="250 V", Brand="Vishay / Dale", Category="Metal Film Resistors - Through Hole", ComponentLink1Description=http://www.mouser.com/ds/2/427/cmfind-239942.pdf, ComponentLink1URL=http://www.mouser.com/ds/2/427/cmfind-239942.pdf, Diameter="2.29 mm", LatestRevisionDate=17-Jul-2002, LatestRevisionNote="Re-released for DXP Platform.", Lead Diameter="0.64 mm", Length="6.1 mm", Minimum Order Quantity=1, PackageDescription="Axial Device, Thru-Hole; 2 Leads; 0.3 in Pin Spacing", PackageReference=AXIAL-0.3, Packaging=Bulk, Pricing 1="1=0.590, 100=0.571, 300=0.561, 500=0.551, 1000=0.515, 2000=0.500, 11000=0.430, 23000=0.400 (USD)", Product="Metal Film Resistors Controlled Temp Coefficient", Published=8-Jun-2000, Publisher="Altium Limited", Reeling=False, RoHS=No, RoHS - Mouser=N, Series="CMF Industrial", Standard Pack Qty=100, Stock 1=893, Supplier 1=Mouser, Termination Style=Axial, Type="Metal Film Resistors, Industrial, Precision"
R8 R46: library part Res1, "Resistor", Manufacturer="Vishay / Dale", Manufacturer Part Number=CMF551M0000FKEB, Operating Temperature Range="- 55 C to + 175 C", Power Rating="500 mW (1/2 W)", Resistance="1 MOhms", Supplier Part Number 1=71-CMF551M0000FKEB, Temperature Coefficient="100 PPM / C", Tolerance="1 %", Voltage Rating="250 V", Brand="Vishay / Dale", Category="Metal Film Resistors - Through Hole", ComponentLink1Description=http://www.mouser.com/ds/2/427/cmfind-239942.pdf, ComponentLink1URL=http://www.mouser.com/ds/2/427/cmfind-239942.pdf, Diameter="2.29 mm", LatestRevisionDate=17-Jul-2002, LatestRevisionNote="Re-released for DXP Platform.", Lead Diameter="0.64 mm", Length="6.1 mm", Minimum Order Quantity=1, PackageDescription="Axial Device, Thru-Hole; 2 Leads; 0.3 in Pin Spacing", PackageReference=AXIAL-0.3, Packaging=Reel, Pricing 1="1=0.310, 50=0.232, 100=0.146, 500=0.125, 1000=0.087, 2000=0.081, 5000=0.073, 10000=0.072, 25000=0.069 (USD)", Product="Metal Film Resistors Controlled Temp Coefficient", Published=8-Jun-2000, Publisher="Altium Limited", Reeling=True, RoHS="RoHS Compliant", RoHS - Mouser=Y, Series="CMF Industrial", Standard Pack Qty=1000, Stock 1=2620, Supplier 1=Mouser, Termination Style=Axial, Type="Metal Film Resistors, Industrial, Precision"
R9 R15: library part Res1, "Resistor", Manufacturer Part Number=CCF0710K0JKE36, Supplier Part Number 1=71-CMF5510K000BEEA, LatestRevisionDate=17-Jul-2002, LatestRevisionNote="Re-released for DXP Platform.", PackageDescription="Axial Device, Thru-Hole; 2 Leads; 0.3 in Pin Spacing", PackageReference=AXIAL-0.3, Published=8-Jun-2000, Publisher="Altium Limited", Supplier 1=Mouser, Supplier Part Number 2=71-CMF5510K000BEEA
R10 R19 R41: library part Res1, "Resistor", Manufacturer="Vishay / Dale", Manufacturer Part Number=CMF07470K00JKR6, Operating Temperature Range="- 55 C to + 175 C", Power Rating="500 mW (1/2 W)", Resistance="470 kOhms", Supplier Part Number 1=71-CMF07470K5%T1TR, Temperature Coefficient="100 PPM / C", Tolerance="5 %", Voltage Rating="250 V", Brand="Vishay / Dale", Category="Metal Film Resistors - Through Hole", ComponentLink1Description=http://www.mouser.com/ds/2/427/cmfind-239942.pdf, ComponentLink1URL=http://www.mouser.com/ds/2/427/cmfind-239942.pdf, Diameter="2.29 mm", LatestRevisionDate=17-Jul-2002, LatestRevisionNote="Re-released for DXP Platform.", Lead Diameter="0.64 mm", Length="6.1 mm", Minimum Order Quantity=1, PackageDescription="Axial Device, Thru-Hole; 2 Leads; 0.3 in Pin Spacing", PackageReference=AXIAL-0.3, Packaging=Reel, Pricing 1="1=0.160, 1000=0.160, 2000=0.085, 4000=0.078, 10000=0.072, 20000=0.066 (USD)", Product="Metal Film Resistors Controlled Temp Coefficient", Published=8-Jun-2000, Publisher="Altium Limited", Reeling=True, RoHS=No, RoHS - Mouser=N, Series="CMF Industrial", Standard Pack Qty=1000, Stock 1=1018, Supplier 1=Mouser, Termination Style=Axial, Type="Metal Film Resistors, Industrial, Precision"
R11: library part Res1, "Resistor", Manufacturer="Vishay / Dale", Manufacturer Part Number=CMF5033K200FHEB, Operating Temperature Range="- 55 C to + 175 C", Power Rating="250 mW (1/4 W)", Resistance="33.2 kOhms", Supplier Part Number 1=71-CMF5033K200FHEB, Temperature Coefficient="50 PPM / C", Tolerance="1 %", Voltage Rating="200 V", Brand="Vishay / Dale", Category="Metal Film Resistors - Through Hole", ComponentLink1Description=http://www.mouser.com/ds/2/427/cmfind-239942.pdf, ComponentLink1URL=http://www.mouser.com/ds/2/427/cmfind-239942.pdf, Diameter="1.65 mm", LatestRevisionDate=17-Jul-2002, LatestRevisionNote="Re-released for DXP Platform.", Lead Diameter="0.41 mm", Length="3.81 mm", Minimum Order Quantity=1, PackageDescription="Axial Device, Thru-Hole; 2 Leads; 0.3 in Pin Spacing", PackageReference=AXIAL-0.3, Packaging=Reel, Pricing 1="1=0.390, 50=0.338, 100=0.278, 500=0.242, 1000=0.217, 2000=0.193, 5000=0.187, 10000=0.181, 25000=0.175 (USD)", Product="Metal Film Resistors Controlled Temp Coefficient", Published=8-Jun-2000, Publisher="Altium Limited", Reeling=True, RoHS="RoHS Compliant", RoHS - Mouser=Y, Series="CMF Industrial", Standard Pack Qty=1000, Stock 1=1365, Supplier 1=Mouser, Termination Style=Axial, Type="Metal Film Resistors, Industrial, Precision"
R12 R17 R26 R32 R52: library part Res1, "Metal Film Resistors - Through Hole 1/4watt 10Kohms 5% Rated to 1/2watt", Manufacturer="Vishay / Dale", Manufacturer Part Number=CCF0710K0JKE36, Operating Temperature Range="- 65 C to + 150 C", Power Rating="250 mW (1/4 W), 500 mW (1/2 W)", Resistance="10 kOhms", Supplier Part Number 1=71-CMF5510K000BEEA, Temperature Coefficient="100 PPM / K", Tolerance="5 %", Voltage Rating="250 V", Brand="Vishay / Dale", Category="Metal Film Resistors - Through Hole", ComponentLink1Description=http://www.mouser.com/ds/2/427/ccf07-239748.pdf, ComponentLink1URL=http://www.mouser.com/ds/2/427/ccf07-239748.pdf, ComponentLink2Description=http://www.mouser.com/ds/2/427/cmfind-239942.pdf, ComponentLink2URL=http://www.mouser.com/ds/2/427/cmfind-239942.pdf, Diameter="2.29 mm", LatestRevisionDate=17-Jul-2002, LatestRevisionNote="Re-released for DXP Platform.", Lead Diameter="0.6 mm", Length="6.22 mm", Minimum Order Quantity=1, PackageDescription="Axial Device, Thru-Hole; 2 Leads; 0.3 in Pin Spacing", PackageReference=AXIAL-0.3, Packaging=Reel, Pricing 1="1=0.100, 100=0.037, 1000=0.033, 2000=0.030, 5000=0.026, 10000=0.020, 25000=0.015, 50000=0.013, 100000=0.012 (USD)", Pricing 2="1=0.610, 5000=0.249, 10000=0.242, 20000=0.236, 50000=0.234 (USD)", Product="Metal Film Resistors - Through Hole", Published=8-Jun-2000, Publisher="Altium Limited", Reeling=True, RoHS="RoHS Compliant", RoHS - Mouser=Y, Series=CCF07, Standard Pack Qty=5000, Stock 1=48658, Stock 2=4124, Supplier 1=Mouser, Supplier 2=Mouser, Supplier Part Number 2=71-CMF5510K000BEEA, Termination Style=Axial, Type="Metal Film Resistors, Industrial"
R14 R25 R44 R45 R47 R58 R67: library part Res1, "Resistor", Manufacturer="Vishay / Dale", Manufacturer Part Number=CMF55100K00FHEK, Operating Temperature Range="- 55 C to + 175 C", Power Rating="500 mW (1/2 W)", Resistance="100 kOhms", Supplier Part Number 1=71-CMF55100K00FHEK, Temperature Coefficient="50 PPM / C", Tolerance="1 %", Voltage Rating="250 V", Brand="Vishay / Dale", Category="Metal Film Resistors - Through Hole", ComponentLink1Description=http://www.mouser.com/ds/2/427/cmfind-239942.pdf, ComponentLink1URL=http://www.mouser.com/ds/2/427/cmfind-239942.pdf, Diameter="2.29 mm", LatestRevisionDate=17-Jul-2002, LatestRevisionNote="Re-released for DXP Platform.", Lead Diameter="0.64 mm", Length="6.1 mm", Minimum Order Quantity=1, PackageDescription="Axial Device, Thru-Hole; 2 Leads; 0.3 in Pin Spacing", PackageReference=AXIAL-0.3, Packaging=Bulk, Pricing 1="1=0.230, 25=0.181, 100=0.132, 500=0.115, 1000=0.099, 2000=0.092, 5000=0.087, 10000=0.082, 25000=0.072 (USD)", Product="Metal Film Resistors Controlled Temp Coefficient", Published=8-Jun-2000, Publisher="Altium Limited", Reeling=False, RoHS="RoHS Compliant", RoHS - Mouser=Y, Series="CMF Industrial", Standard Pack Qty=100, Stock 1=4041, Supplier 1=Mouser, Termination Style=Axial, Type="Metal Film Resistors, Industrial, Precision"
  R14 R25 R44 R45 R47: Supplier Part Number 2=71-CMF55100K00BEEB
  R58 R67: Supplier Part Number 2=71-CMF50100K00FHEB